# Altium PCB pcb big.PcbDoc (part 4 of 5)
Units mil, origin at the board's own origin, x right, y up, seen from the top; angles counter-clockwise.
Board outline 4068 x 10796 mil, 6 copper layers (TopLayer, MidLayer1, MidLayer2, MidLayer3, MidLayer4, BottomLayer); 521 components, 260 nets, 1284 pads, 1180 vias.
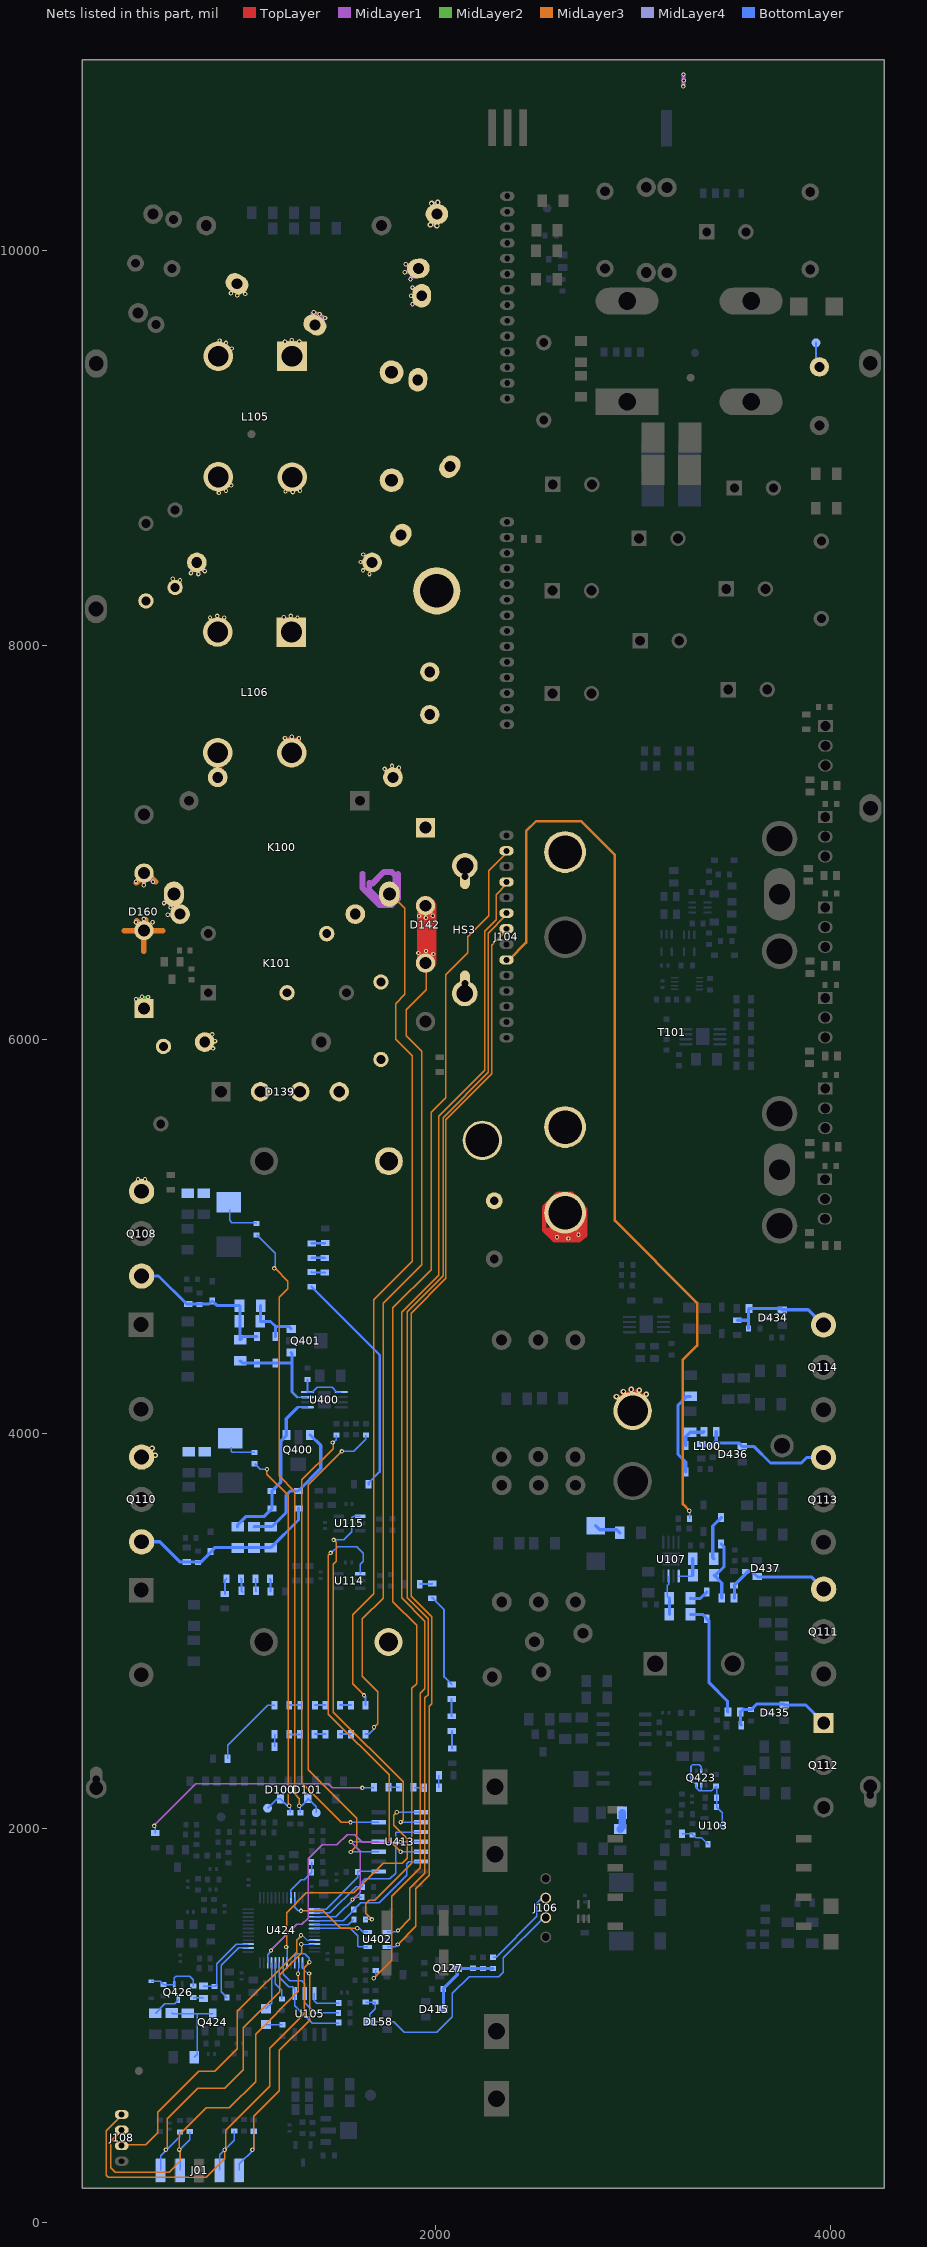
[diagram p8: the nets of this part, all layers, seen from the top]

## Via types
v1: diameter 22, hole 11, TopLayer to BottomLayer, 1101 vias
v2: diameter 28, hole 14, TopLayer to BottomLayer, 79 vias

## Nets (pads, with @x,y where several pads share a name; then routed paths per layer and width w, separated by ;. In a path a pad name is that pad's centre, name@x,y a point inside that pad or via, vN(x,y) a via of type N, cw(c..) or ccw(c..) an arc to the next point about the centre after c; other vN are vias at no path point) (continued)
UnNamedNet160: D434.1 LB116.2 Q114.1 R157.1 R248.1 | length 579.3
  BottomLayer w16: R248.1@3529,4576 3585,4576 ; R157.1@3586,4534 3586,4633 LB116.2@3589,4636 3749,4636 D434.1@3756,4629 3888,4629 3968,4549 Q114.1@3968,4544
UnNamedNet162: D104.1 R223.2 | length 437.8
  BottomLayer w16: D104.1@3267,3806 3267,3857 3228,3896 3228,4145 3273,4190 R223.2@3292,4190
UnNamedNet163: D104.2 LB117.1 R233.2 | length 146.8
  BottomLayer w16: D104.2@3267,3941 3267,3985 R233.2@3290,4008 3356,4008 LB117.1@3359,4011
UnNamedNet164: D436.1 LB117.2 Q113.1 R158.1 R241.1 | length 745.5
  BottomLayer w16: R241.1@3345,3948 3354,3939 3397,3939 3422,3964 LB117.2@3422,4011 ; 3412.73,3954.73 3413.46,3954 3536,3954 3555,3935 3614,3935 3697,3852 3853,3852 3881,3880 Q113.1@3966,3880
UnNamedNet166: D130.2 LB114.1 R219.2 | length 321
  BottomLayer w16: D130.2@3447,3441 3462,3426 3462,3327 3417,3282 R219.2@3411,3282 3450,3243 LB114.1@3450,3167
UnNamedNet167: D130.1 R228.2 | length 230.3
  BottomLayer w16: R228.2@3410,3366 3404,3372 3404,3532 3447,3575 D130.1@3447,3576
UnNamedNet169: D437.1 LB114.2 Q111.1 R239.2 R1580.2 | length 586.1
  BottomLayer w16: LB114.2@3513,3167 3515,3169 3515,3234 3584,3303 3602,3303 3631,3274 3904,3274 3966,3212 Q111.1@3967,3212
UnNamedNet170: R219.1 R228.1 U107.5 | length 159.1
  BottomLayer w7: U107.5@3231,3278 3300,3278 R219.1@3304,3282
  BottomLayer w16: R228.1@3303,3366 3303,3283 R219.1@3304,3282
UnNamedNet171: R220.1 R229.1 U107.7 | length 200.6
  BottomLayer w7: U107.7@3179.82,3278 3179.82,3237.82 3174,3232 3174,3176 R229.1@3184,3166
  BottomLayer w16: R220.1@3184,3084 R229.1@3184,3166
UnNamedNet172: J104.6 R280.2 | length 4828
  MidLayer3 w13: J104.6@2358,6404 2370,6404 2458,6492 2458,7057 2509,7108 2737,7108 2908,6937 2908,5081 3325,4664 3325,4448 3253,4376 3253,3644 3285,3612 v1(3285,3610)
  BottomLayer w7: v1(3285,3610) 3287,3608 R280.2@3287,3569
UnNamedNet173: D151.1 R103.1 | length 137.9
  BottomLayer w16: D151.1@2810,3534 2831,3513 2918,3513 R103.1@2933,3498
UnNamedNet174: D123.1 R229.2 | length 96.7
  BottomLayer w16: R229.2@3291,3166 3292,3165 3342,3165 D123.1@3374,3197
UnNamedNet175: D123.2 LB1180.1 R220.2 | length 609.4
  BottomLayer w16: R220.2@3291,3084 3352,3084 3386,3050 3386,2737 3479,2644 3479,2591 LB1180.1@3481,2589
UnNamedNet177: D435.1 LB1180.2 Q112.1 R160.1 R240.2 | length 549.2
  BottomLayer w16: R240.2@3549,2522 3545,2526 3545,2588 LB1180.2@3544,2589 3556,2601 3600,2601 3629,2630 3762,2630 D435.1@3767,2625 3875,2625 Q112.1@3967,2533
UnNamedNet178: Q423.2 Q423.5 Q423.6 R148.2 R318.2 R538.2 U103.3 | length 559
  BottomLayer w8: 3346,2192 Q423.5@3346,2219 ; Q423.2@3346,2290 3346,2311 3336,2321 3301,2321 3294,2314 3294,2244 3319,2219 Q423.6@3321,2219 3321,2204 3336,2189 3398,2189 3421,2212 R538.2@3421,2213 3424,2210 3424,2106 3452,2078 U103.3@3452,2013
UnNamedNet179: R187.2 R261.2 R492.2 | length 154
  BottomLayer w8: R261.2@3249,1971 3298,1971 3319,1950 3349,1950 R492.2@3381,1918
UnNamedNet183: R553.2 R5520.1 | length 87.4
  BottomLayer w38: R5520.1@2935,1995 2946,2006 2946,2075 R553.2@2944,2077
UnNamedNet184: R299.2 R300.1 | length 68
  BottomLayer w11: R300.1@1370,4967 R299.2@1438,4967
UnNamedNet185: R300.2 R301.1 | length 67.8
  BottomLayer w11: R300.2@1369,4892 1370,4893 1435,4893 R301.1@1436,4892
UnNamedNet186: R301.2 R302.1 | length 67.8
  BottomLayer w11: R302.1@1369,4820 1371,4818 R301.2@1436,4818
UnNamedNet187: R302.2 R303.2 | length 1169.5
  BottomLayer w12: R302.2@1369,4746 1715,4400 1715,3808 1659,3752 R303.2@1659,3743
UnNamedNet188: Q108.3 R137.1 R141.1 R574.1 R575.1 | length 197.2
  BottomLayer w7: R137.1@953,5136 953,5082 965,5070 1087,5070 R141.1@1090,5067
  other v1: 489,5291 524,5291
UnNamedNet189: D101.3 R141.2 R499.1 TP6.1 | length 3221.1
  MidLayer3 w7: v1(1180,4839) 1184,4839 1248,4775 1248,4736 1204,4692 1204,3786 1283,3707 1283,2173 1307,2149 v1(1307,2113)
  BottomLayer w7: R141.2@1090,5009 1091,5009 1185,4915 1185,4844 v1(1180,4839) ; R499.1@1313,2078 1313,2107 v1(1307,2113) 1320,2113 1350,2143 D101.3@1350,2151 1393,2108 TP6.1@1393,2078
UnNamedNet190: D148.1 D432.1 Q108.1 R152.1 R154.2 R199.1 R235.2 R1930.1 | length 839.1
  BottomLayer w15: Q108.1@507,4800 508,4801 593,4801 736,4658 849,4658 D432.1@865,4674 867,4674 891,4650 R1930.1@1004,4650 1007,4647 R152.1@1007,4477 1023,4493 D148.1@1092,4493
UnNamedNet191: D105.2 Q401.3 R199.2 R1930.2 | length 306.1
  BottomLayer w15: R1930.2@1111,4650 1111,4572 R199.2@1109,4570 1161,4570 1187,4544 1187,4542 ; D105.2@1185,4494 1187,4496 1187,4542 ; Q401.3@1266,4532 1253,4545 1190,4545 1187,4542
UnNamedNet192: D105.1 D148.2 Q401.1 R152.2 U400.7 | length 559.2
  BottomLayer w7: 1295.82,4186.18 U400.7@1348,4186.18
  BottomLayer w15: R152.2@1007,4370 1018,4359 1267,4359 1270,4362 ; Q401.1@1266,4412 1270,4408 1270,4212 1295.82,4186.18
UnNamedNet193: R556.2 U400.1 U400.8 | length 255.4
  BottomLayer w7: U400.8@1348,4211.77 1373.77,4211.77 1397,4235 1475,4235 1498,4212 U400.1@1520,4212
  BottomLayer w11: U400.8@1348,4211.77 R556.2@1348,4276
UnNamedNet194: D103.1 D149.2 Q400.1 R147.1 U400.5 | length 835.6
  BottomLayer w10: 1297,4132 1300,4135 U400.5@1348,4135
  BottomLayer w16: R147.1@994,3528 994,3538 1037,3581 1129,3581 1169,3621 1169,3711 1213,3755 1213,3963 1241,3991 1241,4076 1297,4132
UnNamedNet195: R131.2 U413.3 | length 2527.8
  MidLayer3 w7: v1(1523,3911) 1353,3741 1353,2295 1599,2049 1599,1911 1568,1880 v1(1568,1879)
  BottomLayer w7: v1(1523,3911) 1584,3911 1645,3972 R131.2@1645,3993 ; v1(1568,1879) 1569,1880 U413.3@1710,1880
UnNamedNet196: R132.2 U413.6 | length 2321.7
  MidLayer3 w7: v1@1476,3960 1478,3962 1478,3924 1320,3766 1320,2229 1520,2029 v1(1567,2029)
  BottomLayer w7: v1(1476,3956) 1480,3956 1495,3971 R132.2@1495,3993 ; v1(1567,2029) 1568,2030 U413.6@1710,2030
UnNamedNet197: Q110.3 R138.1 R143.1 R576.1 R577.1 | length 140.5
  BottomLayer w7: R138.1@961,3931 961,3912 967,3906 972,3906 R143.1@1080,3906
  other v2: 576,3891 560,3927
UnNamedNet198: D100.3 R143.2 R496.1 TP7.1 | length 2010.3
  MidLayer3 w7: v1(1143,3820) 1143,3795 1250,3688 1250,2119 v1(1256,2113)
  BottomLayer w7: R143.2@1080,3848 1081,3848 1109,3820 v1(1143,3820) ; TP7.1@1146,2101 1194,2149 D100.3@1211,2149 1247,2113 v1(1256,2113) 1261,2108 R496.1@1261,2078
UnNamedNet199: D103.2 Q400.3 R130.1 R201.1 | length 705.5
  BottomLayer w15: Q400.3@1362,3994 Q400.3@1363,3994
  BottomLayer w16: R201.1@1077,3528 1079,3530 1169,3530 1240,3601 1240,3689 1261,3710 1301,3710 1416,3825 1416,3941 Q400.3@1363,3994
UnNamedNet200: U115.1 U413.9 | length 1926.1
  MidLayer3 w7: v1(1481,3462) 1483,3462 1494,3451 1494,3353 1480,3339 1480,2588 1834,2234 1834,2043 v1(1821,2030)
  BottomLayer w7: v1(1481,3462) 1532,3462 1573,3503 1573,3573 1582,3582 U115.1@1617,3582 ; v1(1821,2030) U413.9@1924,2030
UnNamedNet201: D149.1 D433.1 Q110.1 R130.2 R147.2 R156.2 R201.2 R237.2 | length 987.5
  BottomLayer w16: Q110.1@507,3452 600,3452 703,3349 808,3349 860,3401 860,3403 881,3424 1164,3424 1303,3563 D149.1@1303,3622
UnNamedNet202: R296.1 R297.1 | length 80.7
  BottomLayer w10: R297.1@929,3188 929,3256 R296.1@938,3265
UnNamedNet203: R296.2 R298.1 | length 70.9
  BottomLayer w10: R296.2@1012,3265 1013,3264 1013,3203 R298.1@1019,3197
UnNamedNet204: R295.1 R298.2 | length 62.7
  BottomLayer w10: R295.1@1084,3264 1086,3262 1086,3205 R298.2@1088,3203
UnNamedNet205: R294.1 R295.2 | length 64.8
  BottomLayer w10: R295.2@1158,3264 1160,3262 R294.1@1160,3200
UnNamedNet206: U114.1 U413.12 | length 2076.5
  MidLayer3 w7: v1(1466,3396) 1455,3385 1455,2577 1762,2270 1762,1939 v1(1821,1880)
  BottomLayer w7: v1(1466,3396) 1470,3396 1501,3427 1599,3427 1631,3395 1631,3354 1616,3339 U114.1@1616,3291 ; v1(1821,1880) U413.12@1924,1880
UnNamedNet207: R113.1 R521.2 | length 63.8
  BottomLayer w10: R521.2@1918,3238 1979,3238 R113.1@1981,3240
UnNamedNet208: R113.2 R114.1 | length 479.8
  BottomLayer w10: R113.2@1981,3166 1984,3166 2042,3108 2042,2767 R114.1@2080,2729
UnNamedNet209: R114.2 R115.1 | length 88.4
  BottomLayer w10: R114.2@2080,2655 2080,2568 R115.1@2081,2567
UnNamedNet210: R115.2 R116.1 | length 90.8
  BottomLayer w10: R115.2@2081,2493 2081,2405 R116.1@2083,2403
UnNamedNet211: R108.1 R109.2 | length 65
  BottomLayer w7: R109.2@2015,2204 R108.1@2015,2269
UnNamedNet212: R109.1 R110.2 | length 52
  BottomLayer w7: R110.2@1889,2204 R109.1@1941,2204
UnNamedNet213: R110.1 R111.2 | length 54
  BottomLayer w7: R111.2@1759,2206 R110.1@1813,2206
UnNamedNet214: R111.1 R520.1 | length 1252.6
  MidLayer1 w7: v1(571,2011) 571,2014 781,2224 1455,2224 1474,2205 1626,2205 v1(1627,2204)
  BottomLayer w7: v1(571,2011) 575,2007 575,1976 R520.1@577,1974 ; v1(1627,2204) 1683,2204 R111.1@1685,2206
UnNamedNet215: R121.1 R122.2 | length 392.1
  BottomLayer w7: R122.2@943,2352 943,2421 1146,2624 R121.1@1182,2624
UnNamedNet216: R120.1 R121.2 | length 56
  BottomLayer w10: R121.2@1256,2624 R120.1@1312,2624
UnNamedNet217: R119.1 R120.2 | length 54
  BottomLayer w10: R120.2@1386,2624 R119.1@1440,2624
UnNamedNet218: R118.1 R119.2 | length 55
  BottomLayer w10: R119.2@1514,2624 R118.1@1569,2624
UnNamedNet219: C588.1 K100.4 L106.3 R118.2 R279.2 | length 5587.1
  TopLayer w48: C588.1@893,7330 L106.3@893,7455
  MidLayer1 w30: 1627,6841 1627,6769 1713,6683 1776,6683 1807,6714 1807,6839 ; 1662,6793 1662,6757 1703,6716 1778,6716 1794,6732 1794,6832 1776,6850 1736,6850 1677,6791
  MidLayer3 w7: v1(1635,2673) 1635,2676 1578,2733 1578,3082 1684,3188 1684,4680 1879,4875 1879,5917 1795,6001 1795,6182 1842,6229 1842,6665 1769,6738 K100.4@1764,6738
  MidLayer3 w18: C588.1@893,7330 L106.3@893,7459
  BottomLayer w10: v1(1635,2673) 1643,2665 R118.2@1643,2624
  BottomLayer w12: C588.1@893,7330 L106.3@893,7442
UnNamedNet220: R123.1 R126.2 | length 55
  BottomLayer w10: R126.2@1514,2477 R123.1@1569,2477
UnNamedNet221: C111.2 C209.1 C588.2 D142.2 D142.3 L106.4 R123.2 | length 6807
  TopLayer w22: v1(1234,7529) L106.4@1268,7454 ; L106.4@1245,7523 1269,7525 1295,7517 1285,7508 L106.4@1253,7512 ; v1(1269,7536) L106.4@1268,7454 ; v1(1305,7528) L106.4@1268,7454
  TopLayer w98: D142.3@1947,6388 1953,6394 1953,6673 D142.2@1947,6679
  MidLayer1 w20: v1(1234,7529) L106.4@1261,7450 ; v1(1269,7536) L106.4@1268,7454 v1(1305,7528) ; v1(1740,7373) C588.2@1782,7330 ; v1(1777,7388) C588.2@1782,7330 ; v1(1812,7379) C588.2@1782,7330 ; v1(1911,6439) D142.3@1947,6388 ; v1(1915,6627) D142.2@1936,6679 ; v1(1949,6618) D142.2@1947,6679 v1(1984,6628) ; v1(1950,6449) D142.3@1947,6388 ; v1(1987,6434) D142.3@1947,6388
  MidLayer2 w19: v1(1740,7373) C588.2@1782,7330 v1(1812,7379) ; v1(1777,7388) C588.2@1779,7319 ; v1(1911,6439) D142.3@1947,6388 ; v1(1915,6627) D142.2@1947,6679 v1(1949,6618) ; v1(1950,6449) D142.3@1947,6388 ; D142.2@1954,6684 v1(1984,6628) ; v1(1987,6434) D142.3@1947,6388
  MidLayer3 w7: v1(1686,2511) 1686,2512 1704,2530 1704,2692 1626,2770 1626,3061 1732,3167 1732,4661 1928,4857 1928,5940 1850,6018 1850,6151 1952,6253 1952,6383 D142.3@1947,6388 ; v1(1911,6439) 1911,6424 D142.3@1947,6388 ; v1(1950,6449) 1947,6446 D142.3@1947,6388 ; v1(1987,6434) 1987,6428 D142.3@1947,6388
  MidLayer3 w18: L106.4@1266,7464 1305,7503 v1(1305,7528) ; v1(1740,7373) 1740,7372 C588.2@1789,7323 ; C588.2@1777,7335 v1(1777,7388) ; C588.2@1782,7330 1812,7360 v1(1812,7379)
  MidLayer3 w20: v1(1915,6627) 1915,6631 1947,6663 D142.2@1947,6679 1949,6677 v1(1949,6618) ; D142.2@1947,6672 1947,6665 v1(1984,6628)
  BottomLayer w10: R123.2@1643,2477 1659,2477 1686,2504 v1(1686,2511)
UnNamedNet222: R125.2 R126.1 | length 53
  BottomLayer w10: R125.2@1386,2476 R126.1@1439,2476
UnNamedNet223: R124.2 R125.1 | length 54
  BottomLayer w10: R124.2@1257,2475 R125.1@1311,2475
UnNamedNet224: R124.1 R127.2 | length 63
  BottomLayer w7: R127.2@1182,2413 R124.1@1182,2476
UnNamedNet227: R155.1 U105.5 U424.43 | length 521.5
  BottomLayer w7: U424.43@1205.43,1316 1205.43,1243.57 1253,1196 1273,1196 1284,1185 U105.5@1284,1162 1284,1099 1372,1011 1505,1011 R155.1@1507,1013
UnNamedNet228: R150.1 U105.6 U424.42 | length 476.2
  BottomLayer w7: U424.42@1225.11,1316 1225.11,1258.89 1258,1226 1319,1226 1334,1211 U105.6@1334,1162 1334,1115 1385,1064 1503,1064 R150.1@1506,1061
UnNamedNet229: R153.1 U105.7 | length 167
  BottomLayer w7: U105.7@1384,1162 1384,1123 1395,1112 1506,1112 R153.1@1507,1113
UnNamedNet230: R413.1 U424.2 | length 350.3
  BottomLayer w7: R413.1@941,1140 940,1140 911,1169 911,1304 998.68,1391.69 U424.2@1048,1391.69
UnNamedNet231: C589.1 R544.1 U424.3 | length 377.5
  BottomLayer w7: C589.1@821,1198 881,1198 889,1206 889,1312 988.37,1411.37 U424.3@1048,1411.37
UnNamedNet232: R171.1 R1480.1 U424.21 | length 233.5
  BottomLayer w7: U424.21@1264.48,1646 1264.48,1685.48 1317,1738 1332,1738 1369,1775 1369,1826 R171.1@1368,1827
UnNamedNet233: U402.3 U424.22 | length 470.7
  MidLayer3 w7: v1(1316,1580) 1429,1580 1517,1492 v1(1601,1492)
  BottomLayer w7: U424.22@1284.17,1646 1284.17,1597.83 1302,1580 v1(1316,1580) ; v1(1601,1492) 1611,1492 1630,1473 U402.3@1655,1473
UnNamedNet234: R441.2 U413.1 U424.25 | length 422.9
  BottomLayer w7: U424.25@1384,1589 1443,1589 1604,1750 1604,1777 R441.2@1603,1778 1605,1780 U413.1@1710,1780
UnNamedNet235: R443.1 U413.10 U424.26 | length 842.5
  BottomLayer w7: U424.26@1384,1569.31 1462.32,1569.31 1596,1703 1624,1703 1627,1706 1627,1728 1642,1743 1767,1743 1795,1771 1795,1975 1800,1980 U413.10@1924,1980
UnNamedNet236: R442.1 U413.4 U424.27 | length 753
  MidLayer1 w7: v1(1568,1930) 1615,1883 1615,1674 1579,1638 v1(1577,1638)
  BottomLayer w7: U424.27@1384,1549.63 1492.63,1549.63 1593,1650 R442.1@1625,1650 ; v1(1568,1930) U413.4@1710,1930
UnNamedNet237: R444.1 U413.13 U424.28 | length 699.4
  BottomLayer w7: U424.28@1384,1529.94 1528.94,1529.94 1619,1620 1713,1620 1853,1760 1853,1820 1863,1830 U413.13@1924,1830
UnNamedNet238: R144.1 U424.29 | length 209.7
  BottomLayer w7: U424.29@1384,1510.26 1555.26,1510.26 1581,1536 R144.1@1583,1536
UnNamedNet239: U402.1 U424.30 | length 339
  BottomLayer w7: U424.30@1384,1490.57 1566.43,1490.57 1604,1453 1604,1403 1609,1398 1654,1398 U402.1@1655,1397
UnNamedNet240: J108.2 U424.33 | length 1638.6
  MidLayer3 w7: J108.2@406,389 410,393 528,393 590,455 590,559 797,766 878,766 992,880 992,1070 1293,1371 1293,1431 1316,1454 v1(1316,1456)
  BottomLayer w6: v1(1316,1456) 1322,1456 1346.48,1431.52 U424.33@1384,1431.52
UnNamedNet241: J01.1 R461.2 U424.34 | length 1713
  MidLayer3 w7: v1(630,368) 637,375 637,526 792,681 930,681 1023,774 1023,986 1207,1170 1207,1255 1319,1367 1319,1409 v1(1317,1411)
  BottomLayer w6: v1(1317,1411) 1317.83,1411.83 U424.34@1384,1411.83
  BottomLayer w7: J01.1@603,264 603,337 701,435 R461.2@701,459
UnNamedNet242: J01.5 R463.2 U424.37 | length 1315.7
  MidLayer3 w7: v1(1069,368) 1075,374 1075,537 1206,668 1206,873 1359,1026 1359,1260 v1(1357,1262)
  BottomLayer w6: U424.37@1323.54,1316 1323.54,1287.46 1349,1262 v1(1357,1262)
  BottomLayer w7: J01.5@1003,264 1003,296 1076,369 R463.2@1076,462
UnNamedNet243: J01.2 J108.3 R464.2 U424.38 | length 2146.1
  MidLayer3 w7: J108.3@406,468 406,466 351,411 351,277 373,255 646,255 703,312 703,364 v1(698,369) 698,444 835,581 952,581 1085,714 1085,955 1301,1171 1301,1260 v1(1300,1261)
  BottomLayer w6: v1(1300,1261) 1303.85,1264.85 U424.38@1303.85,1316
  BottomLayer w7: J01.2@703,264 702,265 702,365 v1(698,369) 700,369 751,420 R464.2@751,460
UnNamedNet244: J01.4 J108.4 R462.2 U424.39 | length 2533.4
  MidLayer3 w7: J108.4@406,547 406,544 327,465 327,239 337,229 835,229 928,322 v1(928,368) 934,374 934,468 1157,691 1157,883 1333,1059 1333,1292 1358,1317 v1(1358,1319)
  BottomLayer w7: J01.4@903,264 903,343 977,417 R462.2@977,464 ; U424.39@1284.17,1316 1284.17,1350.17 1297,1363 1334,1363 1358,1339 v1(1358,1319)
UnNamedNet245: U413.8 U424.41 | length 1375.3
  MidLayer3 w7: v1(1240,1397) 1243,1400 1243,1571 1343,1671 1582,1671 1732,1821 1829,1821 1855,1847 1855,1945 1786,2014 1786,2064 1801,2079 v1(1801,2080)
  BottomLayer w7: v1(1240,1397) 1244.8,1392.2 U424.41@1244.8,1316 ; v1(1801,2080) U413.8@1924,2080
UnNamedNet246: R559.1 U424.44 | length 197.8
  BottomLayer w7: U424.44@1185.74,1316 1185.74,1211.26 1219,1178 R559.1@1219,1132
UnNamedNet247: D412.1 U424.45 | length 245
  BottomLayer w7: D412.1@1137,1083 1166.06,1112.06 U424.45@1166.06,1316
UnNamedNet248: U413.11 U424.46 | length 1266.7
  MidLayer1 w7: v1(1163,1379) 1163,1380 1294,1511 1320,1511 1352,1543 1352,1844 1423,1915 1498,1915 1549,1966 1589,1966 1626,1929 1819,1929 v1(1820,1930)
  BottomLayer w7: U424.46@1146.37,1316 1146.37,1357.37 1163,1374 v1(1163,1379) ; v1(1820,1930) U413.11@1924,1930
UnNamedNet249: J104.9 U402.4 | length 5536.1
  MidLayer3 w7: v1(1808,1480) 1809,1480 1868,1539 1868,1694 1944,1770 1944,2661 1960,2677 1960,3063 1854,3169 1854,4620 2036,4802 2036,5604 2265,5833 2265,6540 2358,6633 J104.9@2358,6641
  BottomLayer w7: U402.4@1752,1473 1801,1473 v1(1808,1480)
UnNamedNet250: J104.8 U402.6 | length 5526.8
  MidLayer3 w7: v1(1806,1409) 1898,1501 1898,1692 1967,1761 1967,2619 1978,2630 1978,3072 1874,3176 1874,4611 2051,4788 2051,5594 2283,5826 2283,6477 2358,6552 J104.8@2358,6562
  BottomLayer w7: U402.6@1752,1397 1794,1397 v1(1806,1409)
UnNamedNet251: D412.2 R418.1 | length 84.4
  BottomLayer w7: D412.2@1137,1003 1220,1003 R418.1@1221,1002
UnNamedNet252: D438.1 Q426.1 R570.1 R572.1 | length 302.9
  BottomLayer w7: D438.1@556,1224 601,1224 619,1206 670,1206 Q426.1@673,1203 673,1240 682,1249 751,1249 769,1231 R570.1@769,1198
UnNamedNet253: Q426.3 R517.1 | length 150.9
  BottomLayer w7: R517.1@576,1061 578,1061 625,1108 675,1108 693,1126 Q426.3@693,1133
UnNamedNet254: RT100.1 TP4.1 | length 247
  MidLayer1 w20: v1@3256,10836 v1(3256,10895)
  MidLayer4 w13: v1@3256,10836 v1(3256,10895)
  BottomLayer w12: TP4.1@3928,9534 3928,9429 RT100.1@3945,9412
  other v1: 3255,10835 3257,10865
UnNamedNet258: Q424.3 R1.2 R539.1 R573.1 | length 437.7
  BottomLayer w7: R573.1@661,1062 664,1059 867,1059 Q424.3@868,1060 ; R1.2@774,837 790,853 790,1058 791,1059
UnNamedNet259: C589.2 R570.2 | length 54.1
  BottomLayer w7: R570.2@769,1140 816,1140 C589.2@821,1135
UnNamedNet260: D158.3 J106.3 R178.2 R465.2 | length 1429.8
  BottomLayer w7: R178.2@1644,1117 1692,1117 R465.2@1693,1118 1693,1084 1664,1055 D158.3@1664,1018 1665,1017 1787,1017 1840,964 2004,964 2083,1043 2083,1161 2168,1246 2319,1246 2341,1268 2341,1341 2546,1546 J106.3@2557,1546
UnNamedNet261: J104.11 R4870.2 | length 5981.7
  MidLayer3 w7: v1(1685,1238) 1776,1329 1776,1655 1920,1799 1920,2683 1944,2707 1944,3050 1826,3168 1826,4617 2014,4805 2014,5611 2247,5844 2247,6549 2305,6607 2305,6735 2358,6788 J104.11@2358,6799
  BottomLayer w7: v1(1685,1238) 1695,1248 R4870.2@1695,1278
UnNamedNet262: C406.2 D415.3 Q127.3 R128.2 R264.2 R402.2 | length 420.2
  BottomLayer w16: D415.3@2037,1081 2038,1082 2038,1185 2108,1255 Q127.3@2108,1289 2110,1287 R402.2@2290,1287
UnNamedNet263: J106.2 R402.1 | length 430.5
  BottomLayer w7: R402.1@2290,1345 2305,1345 2512,1552 2512,1619 2538,1645 J106.2@2557,1645
UnNamedNet264: J104.13 R144.2 | length 5879.4
  MidLayer3 w7: v1(1675,1537) 1674,1537 1644,1567 1644,1616 1661,1633 1690,1633 1878,1821 1878,2708 1903,2733 1903,3028 1782,3149 1782,4639 1976,4833 1976,5630 2051,5705 2051,6329 2162,6440 2162,6522 2267,6627 2267,6855 2358,6946 J104.13@2358,6957
  BottomLayer w7: R144.2@1642,1537 v1(1675,1537)
UnNamedNet265: C404.1 D139.2 D139.3 D139.4 D142.1 D160.1 J005.2 L103.2 | length 660.1
  MidLayer2 w19: D160.1@516,6198 D160.1@519,6157 ; D160.1@519,6157 v1(540,6215) 520,6211 498,6205 v1(479,6204) D160.1@519,6157
  MidLayer3 w18: v1(479,6204) D160.1@519,6157 v1(509,6217) ; D160.1@489,6194 D160.1@526,6203 ; D160.1@508,6185 D160.1@522,6190 ; D160.1@517,6145 v1(540,6215)
  MidLayer4 w20: v1(479,6204) D160.1@519,6157 ; v1(509,6217) D160.1@519,6157 ; v1(540,6215) D160.1@519,6157
  other v1: 870,5955 880,5992 865,6026
UnNamedNet266: C209.2 C417.1 J004.1
UnNamedNet267: HS3.1 HS3.3
UnNamedNet268: HS3.2 HS3.4
UnNamedNet269: C111.1 C208.1 D160.2 D160.3 K100.3 K101.4 | length 2311.3
  MidLayer1 w20: v1(478,6595) D160.2@519,6553 ; v1(479,6801) D160.3@519,6844 ; v1(518,6612) D160.2@519,6553 ; v1(518,6783) D160.3@519,6844 ; v1(563,6595) D160.2@519,6553 ; v1(565,6800) D160.3@519,6844 ; v1(621,6692) K100.3@671,6738 v1(654,6670) ; v1(640,6633) C111.1@711,6630
  MidLayer2 w19: v1(478,6595) D160.2@519,6553 ; v1(479,6801) D160.3@519,6844 ; v1(518,6612) D160.2@519,6553 ; v1(518,6783) D160.3@519,6844 ; v1(563,6595) D160.2@519,6553 ; v1(565,6800) D160.3@519,6844 ; v1(621,6692) K100.3@671,6738 ; v1(640,6633) C111.1@702,6636
  MidLayer3 w28: 420,6553 D160.2@519,6553 ; v1@481,6795 527,6841 527,6855 527,6853 580,6800 ; v1@483,6602 519,6566 D160.2@519,6553 ; 519,6449 D160.2@519,6553 ; D160.2@527,6562 v1@527,6607 ; 615,6553 D160.2@519,6553
  MidLayer4 w20: v1(478,6595) D160.2@519,6553 ; v1(479,6801) D160.3@519,6844 ; v1(518,6612) D160.2@519,6553 ; v1(518,6783) 513,6858 v1(565,6800) ; v1(563,6595) D160.2@519,6553 ; v1(621,6692) K100.3@671,6738 v1(654,6670) ; v1(640,6633) C111.1@702,6636 K100.3@675,6726
UnNamedNet270: K101.2 R279.1
UnNamedNet272: C205.2 C222.2 L105.4 L106.1
  other v1: 1298,8140 1228,8142 1264,8149 1663,8361 1630,8380 1618,8422 1631,8460 1274,8777 1237,8780 1310,8784
UnNamedNet273: C204.2 C222.1 L105.3 L106.2 | length 180.8
  MidLayer4 w20: v1(757,8366) C222.1@787,8420 ; v1(795,8361) C222.1@787,8420 ; v1(827,8376) C222.1@787,8420
  other v1: 854,8140 926,8140 891,8149 702,8330 665,8337 899,8772 935,8784 962,8811
UnNamedNet274: F102.2 L105.2 RV101.2 RV102.1 | length 793.9
  MidLayer2 w19: v1(960,9786) RV102.1@991,9834 v1(992,9774)
  MidLayer3 w18: v1(935,9534) L105.2@896,9466 v1(964,9505) ; v1(960,9786) RV102.1@991,9834 ; v1(992,9774) RV102.1@991,9834 ; v1(1033,9782) RV102.1@991,9834
  MidLayer4 w20: v1(960,9786) RV102.1@991,9834
  BottomLayer w20: v2@1975,10134 1976,10135 2001,10135 2001,10227 2010,10236 1989,10236 1983,10230 1983,10144 F102.2@1982,10143 ; v2(1978,10241) 2006,10241 v2@2008,10239
  other v1: 903,9546
  other v2: 2005,10128 1972,10133 2009,10246
UnNamedNet275: G130.1 RV100.2 RV101.1
UnNamedNet276: F103.2 L105.1 RV100.1 RV102.2 | length 2907.1
  MidLayer1 w20: v1(1234,9540) L105.1@1270,9466 ; v1@1242,9537 1289,9534 1276,9491 L105.1@1257,9524 ; v1(1269,9548) L105.1@1270,9466 ; v1(1307,9541) L105.1@1270,9466 ; v1@1374,9684 RV102.2@1386,9625 v1(1438,9660) ; v1@1377,9680 1423,9658 RV102.2@1401,9645 ; RV102.2@1384,9643 v1(1410,9679) ; v1(1842,9892) F103.2@1911.27,9911.27 v1(1847,9933) ; v1(1871,9857) F103.2@1898,9914 ; v1(1874,9773) RV100.1@1935,9769 ; v1(1881,9730) RV100.1@1935,9769 ; v1(1881,9814) RV100.1@1935,9769
  MidLayer2 w15: v1@1380,9688 RV102.2@1386,9625 1401,9625 1436,9660 v1(1438,9660) v1@1388,9685 ; v1@1382,9679 RV102.2@1426,9652 ; RV102.2@1410,9649 v1(1410,9679) ; v1(1842,9892) F103.2@1911.27,9911.27 ; v1(1847,9933) F103.2@1911.27,9911.27 ; v1(1871,9857) F103.2@1911.27,9911.27
  MidLayer3 w18: L105.1@1270,9466 v1(1307,9541) ; RV102.2@1392,9663 1390,9675 1423,9661 1410,9653 v1(1438,9660) ; v1(1842,9892) F103.2@1911.27,9911.27 v1(1871,9857) ; v1(1847,9933) F103.2@1894,9910 ; v1(1881,9730) RV100.1@1928,9773 v1(1881,9814) ; RV102.2@1386,9625 v1(1438,9660) ; RV102.2@1386,9625 v1(1380,9689) v1(1410,9679) ; RV102.2@1386,9625 v1(1410,9679) ; v1(1410,9679) v1(1438,9660)
  MidLayer4 w20: L105.1@1270,9466 v1(1307,9541) ; v1(1380,9689) RV102.2@1386,9625 v1(1410,9679) ; RV102.2@1394,9631 1415,9666 v1(1438,9660) ; v1(1842,9892) F103.2@1911.27,9911.27 v1(1847,9933) ; v1(1871,9857) F103.2@1920,9922 ; v1(1874,9773) RV100.1@1928,9773 v1(1881,9814) ; v1(1881,9730) RV100.1@1927,9761
UnNamedNet277: G130.2 M105.1
UnNamedNet284: L100.1 T101.4 | length 5063
  TopLayer w22: T101.4@2560,5134 2620,5206 2694,5204 2739,5137 2738,5009 2723,4999 2603,4998 2586,5008 2741,5012 2720,5026 2575,5023 2570,5035 T101.4@2721,5039 ; T101.4@2620,5194 T101.4@2682,5189 ; 2550,5033 2601,4982 2727,4981 2758,5008 2759,5140 2689,5217 2618,5219 2550,5150 2550,5033
  TopLayer w28: v2(2916,4189) L100.1@2998,4116 ; v2(2951,4214) L100.1@2998,4116 ; v2(2991,4225) L100.1@2998,4116 ; L100.1@3012,4195 2942,4181 2960,4196 3011,4211 L100.1@3057,4183 ; v2(3032,4221) L100.1@2998,4116 ; v2(3067,4201) L100.1@2998,4116
  MidLayer3 w18: v2(2916,4189) L100.1@2996,4106 ; v2(2951,4214) L100.1@2996,4106 ; v2(2991,4225) L100.1@2996,4106 ; v2(3032,4221) L100.1@2996,4106 ; v2(3067,4201) L100.1@2996,4106
  MidLayer4 w20: v2(2916,4189) L100.1@2998,4116 ; v2(2951,4214) L100.1@3003,4134 ; v2(2991,4225) L100.1@2998,4116 ; v2(3032,4221) L100.1@2998,4116 ; v2(3067,4201) L100.1@2998,4116
  BottomLayer w18: v2(2916,4189) L100.1@2998,4116 v2(2951,4214) ; v2(2991,4225) L100.1@2999,4097 ; v2(3032,4221) L100.1@2999,4097 ; v2(3067,4201) L100.1@2999,4097
  BottomLayer w20: T101.4@2633,5026 T101.4@2698,5026 ; 2634,5014 2696,5036 2709,5017 2665,5004 ; v1(2614,4997) 2665,5004 ; v1(2614,4997) 2628,5046 T101.4@2655,5121 ; v1(2614,4997) v1(2672,4991) v1(2723,5010) 2713,5042 T101.4@2655,5121 ; T101.4@2655,5121 2665,5004
UnNamedNet285: T101.1 T101.3
pads on no net: D100.2 D101.2 D434.3 D435.3 D436.3 D437.3 ID100.1 ID101.1 ID102.1 ID103.1 ID104.1 ID105.1 J101.12 J101.14 J104.3 J104.4 J105.10 J105.13 J402.3 K101.3 L100.3 T100.8 T100.9 U110.3 U110.9 U110.10
copper on no net: | length 2242.3
  TopLayer w8: 3290,9302 3318,9302 3348,9332 3348,9383 3319,9412 3268,9412 3237,9381 3237,9332 3267,9302 3304,9302 ; 437,745 469,713 483,713 517,713 548,744 548,794 518,824 469,824 437,792 437,745
  TopLayer w10: 1010,9043 1038,9015 1058,9015 1091,9015 1120,9044 1120,9094 1089,9125 1039,9125 1010,9096 1010,9043
  BottomLayer w10: 442,746 472,716 489,716 523,716 553,746 553,796 522,827 473,827 442,796 442,746 ; 1012,9043 1038,9017 1055,9017 1093,9017 1122,9046 1122,9096 1091,9127 1041,9127 1012,9098 1012,9043 ; 3259,9459 3287,9431 3308,9431 3342,9431 3369,9458 3369,9509 3339,9539 3288,9539 3259,9510 3259,9459

## Polygon pours and split planes (outlines as drawn)
UnNamedNet50 on TopLayer "TopLayer-UnNamedNet50" (hatched 90Degree grid 5 track 6, remove dead copper, pour order 0): 556,2742 556,2725 585,2725 603,2743 603,2813 564,2852 504,2852 455,2803 455,2756 486,2725 555,2725 555,2743
UnNamedNet49 on TopLayer "TopLayer-UnNamedNet49" (hatched 90Degree grid 5 track 6, remove dead copper, pour order 1): 2918,2143 2942,2143 2942,2273 2935,2280 2880,2280 2874,2274 2874,2090 2943,2090 2943,2143
UnNamedNet21 on TopLayer "TopLayer-UnNamedNet21" (hatched 90Degree grid 5 track 6, remove dead copper, pour order 2): 18 vertices, not listed, extent 1730,1418 2063,1628
UnNamedNet8 on TopLayer "TopLayer-UnNamedNet8" (hatched 90Degree grid 5 track 6, remove dead copper, pour order 3): 20 vertices, not listed, extent 1731,1266 2549,1951
UnNamedNet8 on TopLayer "TopLayer-UnNamedNet8 1" (hatched 90Degree grid 5 track 6, remove dead copper, pour order 4): 2897,1491 2897,1475 2953,1475 3035,1393 3061,1393 3065,1397 3065,1439 2989,1515 2869,1515 2869,1483 2877,1475 2899,1475 2899,1489
UnNamedNet147 on TopLayer "TopLayer-UnNamedNet147" (hatched 90Degree grid 5 track 6, remove dead copper, pour order 5): 3896,3429 3896,3415 3987,3415 3987,3507 3890,3507 3873,3490 3873,3426 3882,3417 3896,3417
UnNamedNet50 on TopLayer "TopLayer-UnNamedNet50 1" (hatched 90Degree grid 5 track 6, remove dead copper, pour order 6): 3928,3635 3928,3614 3989,3614 4020,3645 4020,3694 3992,3722 3888,3722 3872,3706 3872,3643 3901,3614 3930,3614 3930,3633
UnNamedNet37 on TopLayer "TopLayer-UnNamedNet37" (hatched 90Degree grid 5 track 6, remove dead copper, pour order 7): 3652,5044 3652,5018 3774,5018 3774,5124 3645,5124 3627,5106 3627,5027 3636,5018 3652,5018
UnNamedNet8 on TopLayer "TopLayer-UnNamedNet8 2" (hatched 90Degree grid 5 track 6, remove dead copper, pour order 8): 1176,3239 1176,3191 1462,3191 1481,3210 1481,4813 1438,4856 1438,5060 1398,5100 885,5100 837,5052 837,3255 901,3191 1176,3191
UnNamedNet13 on TopLayer "TopLayer-UnNamedNet13" (hatched 90Degree grid 5 track 6, remove dead copper, pour order 9): 19 vertices, not listed, extent 3236,8815 3946,9304
UnNamedNet7 on TopLayer "TopLayer-UnNamedNet7" (hatched 90Degree grid 5 track 6, remove dead copper, pour order 10): 3038,8829 3038,8797 3136,8797 3157,8818 3157,9123 2984,9123 2951,9090 2951,8809 2963,8797 3038,8797
UnNamedNet4 on TopLayer "TopLayer-UnNamedNet4" (hatched 90Degree grid 5 track 6, remove dead copper, pour order 11): 93 vertices, not listed, extent 2424,4981 4122,9334
UnNamedNet7 on TopLayer "TopLayer-UnNamedNet7 1" (hatched 90Degree grid 5 track 6, remove dead copper, pour order 12): 73 vertices, not listed, extent 3916,4949 4106,7837
UnNamedNet41 on TopLayer "TopLayer-UnNamedNet41" (hatched 90Degree grid 5 track 6, remove dead copper, pour order 13): 3881,5061 3867,5061 3867,5191 3891,5215 3981,5215 3981,5138 3932,5138 3913,5119 3913,5061 3916,5058 3916,5006 3875,5006 3867,5014 3867,5060 3881,5060
UnNamedNet41 on TopLayer "TopLayer-UnNamedNet41 1" (hatched 90Degree grid 5 track 6, remove dead copper, pour order 14): 36 vertices, not listed, extent 3660,5466 4001,6516
UnNamedNet37 on TopLayer "TopLayer-UnNamedNet37 1" (hatched 90Degree grid 5 track 6, remove dead copper, pour order 15): 3910,6588 3910,6597 3995,6597 3995,6549 3988,6542 3950,6542 3918,6510 3918,6384 3879,6384 3879,6465 3874,6488 3867,6506 3867,6593 3871,6597 3910,6597
UnNamedNet37 on TopLayer "TopLayer-UnNamedNet37 2" (hatched 90Degree grid 5 track 6, remove dead copper, pour order 16): 34 vertices, not listed, extent 3690,6857 4004,7514
UnNamedNet50 on TopLayer "TopLayer-UnNamedNet50 2" (hatched 90Degree grid 5 track 6, remove dead copper, pour order 17): 3925,4299 3925,4280 3994,4280 4025,4311 4025,4352 3985,4392 3897,4392 3873,4368 3873,4300 3893,4280 3923,4280 3923,4299
UnNamedNet147 on TopLayer "TopLayer-UnNamedNet147 1" (hatched 90Degree grid 5 track 6, remove dead copper, pour order 18): 3928,4078 3928,4066 3999,4066 4029,4096 4029,4132 3983,4178 3891,4178 3874,4161 3874,4084 3892,4066 3928,4066
UnNamedNet11 on TopLayer "TopLayer-UnNamedNet11" (hatched 90Degree grid 5 track 6, remove dead copper, pour order 19): 72 vertices, not listed, extent 3904,1352 4268,10324
UnNamedNet23 on TopLayer "TopLayer-UnNamedNet23" (hatched 90Degree grid 5 track 6, remove dead copper, pour order 20): 3998,9077 3998,9062 4053,9062 4081,9090 4081,9754 4073,9762 3978,9762 3978,9524 4006,9496 4006,9256 3898,9148 3898,9081 3917,9062 3998,9062
UnNamedNet22 on TopLayer "TopLayer-UnNamedNet22" (hatched 90Degree grid 5 track 6, remove dead copper, pour order 21): 30 vertices, not listed, extent 3149,9563 4075,10745
UnNamedNet61 on TopLayer "TopLayer-UnNamedNet61" (hatched 90Degree grid 5 track 6, remove dead copper, pour order 22): 24 vertices, not listed, extent 2821,9574 3414,10134
UnNamedNet22 on TopLayer "TopLayer-UnNamedNet22 1" (hatched 90Degree grid 5 track 6, remove dead copper, pour order 23): 2497,9805 2497,9793 2527,9793 2530,9796 2533,9799 2533,9886 2478,9886 2472,9880 2472,9797 2475,9794 2497,9794
UnNamedNet34 on TopLayer "TopLayer-UnNamedNet34" (hatched 90Degree grid 5 track 6, remove dead copper, pour order 24): 20 vertices, not listed, extent 2629,10121 3215,10744
UnNamedNet69 on TopLayer "TopLayer-UnNamedNet69" (hatched 90Degree grid 5 track 6, remove dead copper, pour order 25): 25 vertices, not listed, extent 1002,10049 1778,10880
UnNamedNet72 on TopLayer "TopLayer-UnNamedNet72" (hatched 90Degree grid 5 track 6, remove dead copper, pour order 26): 18 vertices, not listed, extent 515,10082 886,10881
UnNamedNet274 on TopLayer "TopLayer-UnNamedNet274" (hatched 90Degree grid 5 track 6, remove dead copper, pour order 27): 930,9438 930,9396 1018,9396 1065,9443 1065,9827 1008,9884 870,9884 787,9801 787,9618 751,9582 751,9435 789,9397 929,9397 929,9440
UnNamedNet276 on TopLayer "TopLayer-UnNamedNet276" (hatched 90Degree grid 5 track 6, remove dead copper, pour order 28): 18 vertices, not listed, extent 1203,9402 1965,9953
UnNamedNet275 on TopLayer "TopLayer-UnNamedNet275" (hatched 90Degree grid 5 track 6, remove dead copper, pour order 29): 19 vertices, not listed, extent 1727,8838 2120,9439
UnNamedNet272 on TopLayer "TopLayer-UnNamedNet272" (hatched 90Degree grid 5 track 6, remove dead copper, pour order 30): 26 vertices, not listed, extent 1198,8000 1724,8928
UnNamedNet265 on TopLayer "TopLayer-UnNamedNet265" (hatched 90Degree grid 5 track 6, remove dead copper, pour order 31): 31 vertices, not listed, extent 779,2884 2072,6095
UnNamedNet265 on TopLayer "TopLayer-UnNamedNet265 1" (hatched 90Degree grid 5 track 6, remove dead copper, pour order 32): 511,6134 511,6105 571,6105 571,6207 558,6207 545,6220 501,6220 493,6212 472,6212 472,6105 510,6105 510,6132
UnNamedNet269 on TopLayer "TopLayer-UnNamedNet269" (hatched 90Degree grid 5 track 6, remove dead copper, pour order 33): 515,6527 515,6505 542,6505 632,6595 692,6595 746,6649 746,6818 673,6891 499,6891 472,6864 472,6535 502,6505 514,6505 514,6528
UnNamedNet11 on TopLayer "TopLayer-UnNamedNet11 1" (hatched 90Degree grid 5 track 6, remove dead copper, pour order 34): 62 vertices, not listed, extent 230,674 685,10324
UnNamedNet273 on TopLayer "TopLayer-UnNamedNet273" (hatched 90Degree grid 5 track 6, remove dead copper, pour order 35): 26 vertices, not listed, extent 647,7995 1110,8925
UnNamedNet7 on MidLayer1 "MidLayer1-UnNamedNet7" (hatched 90Degree grid 5 track 6, remove dead copper, pour order 36): 82 vertices, not listed, extent 3925,4766 4176,7841
UnNamedNet4 on MidLayer1 "MidLayer1-UnNamedNet4" (hatched 90Degree grid 5 track 6, remove dead copper, pour order 37): 24 vertices, not listed, extent 2450,7290 4140,9425
UnNamedNet41 on MidLayer1 "MidLayer1-UnNamedNet41" (hatched 90Degree grid 5 track 6, remove dead copper, pour order 38): 36 vertices, not listed, extent 3661,5150 4005,6516
UnNamedNet37 on MidLayer1 "MidLayer1-UnNamedNet37" (hatched 90Degree grid 5 track 6, remove dead copper, pour order 39): 38 vertices, not listed, extent 3065,4761 4004,7600
UnNamedNet16 on MidLayer1 "MidLayer1-UnNamedNet16" (hatched 90Degree grid 5 track 6, remove dead copper, pour order 40): 35 vertices, not listed, extent 347,279 1936,2351
UnNamedNet219 on MidLayer1 "MidLayer1-UnNamedNet219" (hatched 90Degree grid 5 track 6, remove dead copper, pour order 41): 35 vertices, not listed, extent 544,6670 2209,7919
UnNamedNet265 on MidLayer1 "MidLayer1-UnNamedNet265" (hatched 90Degree grid 5 track 6, remove dead copper, pour order 42): 31 vertices, not listed, extent 449,5323 2278,7142
UnNamedNet284 on MidLayer1 "MidLayer1-UnNamedNet284" (hatched 90Degree grid 5 track 6, remove dead copper, pour order 43): 17 vertices, not listed, extent 2530,4025 3089,5229
UnNamedNet90 on MidLayer1 "MidLayer1-UnNamedNet90" (hatched 90Degree grid 5 track 6, remove dead copper, pour order 44): 31 vertices, not listed, extent 2137,3693 2875,6651
UnNamedNet50 on MidLayer1 "MidLayer1-UnNamedNet50" (hatched 90Degree grid 5 track 6, remove dead copper, pour order 45): 93 vertices, not listed, extent 423,839 4031,5875
UnNamedNet21 on MidLayer1 "MidLayer1-UnNamedNet21" (hatched 90Degree grid 5 track 6, remove dead copper, pour order 46): 19 vertices, not listed, extent 2822,1398 3276,1912
UnNamedNet8 on MidLayer1 "MidLayer1-UnNamedNet8" (hatched 90Degree grid 5 track 6, remove dead copper, pour order 47): 29 vertices, not listed, extent 3543,2002 4040,2869
UnNamedNet7 on MidLayer1 "MidLayer1-UnNamedNet7 1" (hatched 90Degree grid 5 track 6, remove dead copper, pour order 48): 25 vertices, not listed, extent 3653,1389 4043,1679
UnNamedNet11 on MidLayer1 "MidLayer1-UnNamedNet11" (hatched 90Degree grid 5 track 6, remove dead copper, pour order 49): 61 vertices, not listed, extent 223,240 393,10321
UnNamedNet11 on MidLayer1 "MidLayer1-UnNamedNet11 1" (hatched 90Degree grid 5 track 6, remove dead copper, pour order 50): 25 vertices, not listed, extent 4116,1359 4258,5721
UnNamedNet11 on MidLayer1 "MidLayer1-UnNamedNet11 2" (hatched 90Degree grid 5 track 6, remove dead copper, pour order 51): 21 vertices, not listed, extent 4112,5866 4253,10354
UnNamedNet72 on MidLayer1 "MidLayer1-UnNamedNet72" (hatched 90Degree grid 5 track 6, remove dead copper, pour order 52): 756,10385 756,10362 817,10362 831,10376 831,10876 656,10876 656,10377 671,10362 755,10362 755,10387
UnNamedNet72 on MidLayer1 "MidLayer1-UnNamedNet72 1" (hatched 90Degree grid 5 track 6, remove dead copper, pour order 53): 645,10110 645,10095 773,10095 867,10189 867,10317 857,10327 538,10327 462,10251 462,10167 534,10095 645,10095
UnNamedNet69 on MidLayer1 "MidLayer1-UnNamedNet69" (hatched 90Degree grid 5 track 6, remove dead copper, pour order 54): 36 vertices, not listed, extent 425,9553 1789,10876
UnNamedNet11 on MidLayer1 "MidLayer1-UnNamedNet11 3" (hatched 90Degree grid 5 track 6, remove dead copper, pour order 55): 1421,10411 1421,10393 1498,10393 1498,10901 1333,10901 1333,10397 1338,10392 1420,10392 1420,10408
UnNamedNet34 on MidLayer1 "MidLayer1-UnNamedNet34" (hatched 90Degree grid 5 track 6, remove dead copper, pour order 56): 17 vertices, not listed, extent 2505,10234 3212,10903
UnNamedNet61 on MidLayer1 "MidLayer1-UnNamedNet61" (hatched 90Degree grid 5 track 6, remove dead copper, pour order 57): 24 vertices, not listed, extent 2814,9649 3204,9959
UnNamedNet22 on MidLayer1 "MidLayer1-UnNamedNet22" (hatched 90Degree grid 5 track 6, remove dead copper, pour order 58): 72 vertices, not listed, extent 2456,9635 4054,10906
UnNamedNet274 on MidLayer1 "MidLayer1-UnNamedNet274" (hatched 90Degree grid 5 track 6, remove dead copper, pour order 59): 30 vertices, not listed, extent 774,8504 2149,10370
UnNamedNet273 on MidLayer1 "MidLayer1-UnNamedNet273" (hatched 90Degree grid 5 track 6, remove dead copper, pour order 60): 23 vertices, not listed, extent 636,7994 1103,8922
UnNamedNet272 on MidLayer1 "MidLayer1-UnNamedNet272" (hatched 90Degree grid 5 track 6, remove dead copper, pour order 61): 23 vertices, not listed, extent 1167,7997 1720,8927
UnNamedNet8 on MidLayer2 "MidLayer2-UnNamedNet8" (hatched 90Degree grid 5 track 6, remove dead copper, pour order 62): 103 vertices, not listed, extent 326,251 4027,7489
UnNamedNet147 on MidLayer2 "MidLayer2-UnNamedNet147" (hatched 90Degree grid 5 track 6, remove dead copper, pour order 63): 38 vertices, not listed, extent 2908,2232 4047,4262
UnNamedNet37 on MidLayer2 "MidLayer2-UnNamedNet37" (hatched 90Degree grid 5 track 6, remove dead copper, pour order 64): 35 vertices, not listed, extent 3030,4759 3994,7549
UnNamedNet284 on MidLayer2 "MidLayer2-UnNamedNet284" (hatched 90Degree grid 5 track 6, remove dead copper, pour order 65): 2975,4074 2975,4024 3052,4024 3084,4056 3084,4523 2898,4709 2898,5029 2704,5223 2576,5223 2531,5178 2531,4781 2810,4502 2810,4094 2879,4025 2975,4025
UnNamedNet7 on MidLayer2 "MidLayer2-UnNamedNet7" (hatched 90Degree grid 5 track 6, remove dead copper, pour order 66): 19 vertices, not listed, extent 3075,5939 3331,6382
UnNamedNet41 on MidLayer2 "MidLayer2-UnNamedNet41" (hatched 90Degree grid 5 track 6, remove dead copper, pour order 67): 31 vertices, not listed, extent 3657,5148 3996,6512
UnNamedNet285 on MidLayer2 "MidLayer2-UnNamedNet285" (hatched 90Degree grid 5 track 6, remove dead copper, pour order 68): 2672,5476 2672,5440 2840,5440 2873,5473 2873,6882 2695,7060 2505,7060 2478,7033 2478,6486 2462,6470 2462,5461 2483,5440 2672,5440
UnNamedNet22 on MidLayer2 "MidLayer2-UnNamedNet22" (hatched 90Degree grid 5 track 6, remove dead copper, pour order 69): 40 vertices, not listed, extent 3318,9625 4064,10905
UnNamedNet61 on MidLayer2 "MidLayer2-UnNamedNet61" (hatched 90Degree grid 5 track 6, remove dead copper, pour order 70): 18 vertices, not listed, extent 2803,9638 3405,10134
UnNamedNet254 on MidLayer2 "MidLayer2-UnNamedNet254" (hatched 90Degree grid 5 track 6, remove dead copper, pour order 71): 3212,10450 3212,10426 3254,10426 3286,10458 3286,10906 3255,10906 3255,10962 3246,10962 3246,10906 3146,10906 3146,10452 3172,10426 3213,10426 3213,10453
UnNamedNet34 on MidLayer2 "MidLayer2-UnNamedNet34" (hatched 90Degree grid 5 track 6, remove dead copper, pour order 72): 30 vertices, not listed, extent 2501,10126 3209,10964
UnNamedNet69 on MidLayer2 "MidLayer2-UnNamedNet69" (hatched 90Degree grid 5 track 6, remove dead copper, pour order 73): 19 vertices, not listed, extent 989,10421 1174,10958
UnNamedNet72 on MidLayer2 "MidLayer2-UnNamedNet72" (hatched 90Degree grid 5 track 6, remove dead copper, pour order 74): 773,10379 773,10363 855,10363 862,10370 862,10511 870,10524 880,10535 880,10879 662,10879 662,10379 678,10363 772,10363 772,10379
UnNamedNet72 on MidLayer2 "MidLayer2-UnNamedNet72 1" (hatched 90Degree grid 5 track 6, remove dead copper, pour order 75): 657,10111 657,10092 819,10092 872,10145 872,10317 861,10328 538,10328 469,10259 469,10167 544,10092 658,10092 658,10112
UnNamedNet277 on MidLayer2 "MidLayer2-UnNamedNet277" (hatched 90Degree grid 5 track 6, remove dead copper, pour order 76): 2004,8231 2004,8173 2084,8173 2142,8231 2142,8554 1806,8890 1737,8890 1703,8856 1703,8702 1758,8647 1849,8647 1913,8583 1913,8213 1953,8173 2004,8173
UnNamedNet272 on MidLayer2 "MidLayer2-UnNamedNet272" (hatched 90Degree grid 5 track 6, remove dead copper, pour order 77): 22 vertices, not listed, extent 1173,7996 1723,8929
UnNamedNet273 on MidLayer2 "MidLayer2-UnNamedNet273" (hatched 90Degree grid 5 track 6, remove dead copper, pour order 78): 23 vertices, not listed, extent 644,7995 1109,8924
UnNamedNet11 on MidLayer2 "MidLayer2-UnNamedNet11" (hatched 90Degree grid 5 track 6, remove dead copper, pour order 79): 160 vertices, not listed, extent 228,242 4243,10959
UnNamedNet11 on MidLayer2 "MidLayer2-UnNamedNet11 1" (hatched 90Degree grid 5 track 6, remove dead copper, pour order 80): 27 vertices, not listed, extent 4104,1368 4246,5719
UnNamedNet7 on MidLayer2 "MidLayer2-UnNamedNet7 1" (hatched 90Degree grid 5 track 6, remove dead copper, pour order 81): 3740,1370 3740,1348 3965,1348 4029,1412 4044,1412 4044,1680 3722,1680 3722,1618 3718,1618 3692,1644 3635,1644 3569,1578 3569,1365 3586,1348 3740,1348
UnNamedNet7 on MidLayer2 "MidLayer2-UnNamedNet7 2" (hatched 90Degree grid 5 track 6, remove dead copper, pour order 82): 101 vertices, not listed, extent 2472,4762 4165,9205